# Altium PCB usb3_plug_to_picoblade.PcbDoc
Units mm, origin at the board's own origin, x right, y up, seen from the top; angles counter-clockwise.
Board outline 10 x 37 mm, 2 copper layers (Top Layer, Bottom Layer), stack 1.571 mm thick; 2 components, 8 nets, 25 pads, 6 vias.
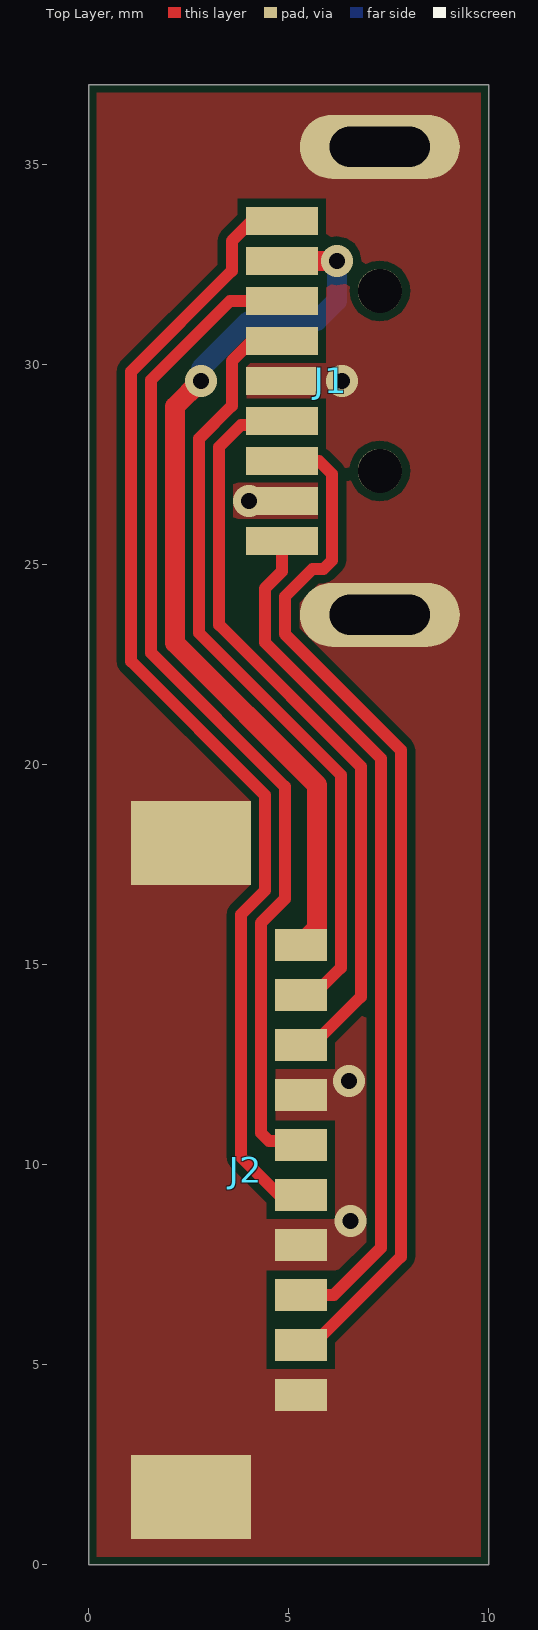
[diagram p0: Top Layer view]
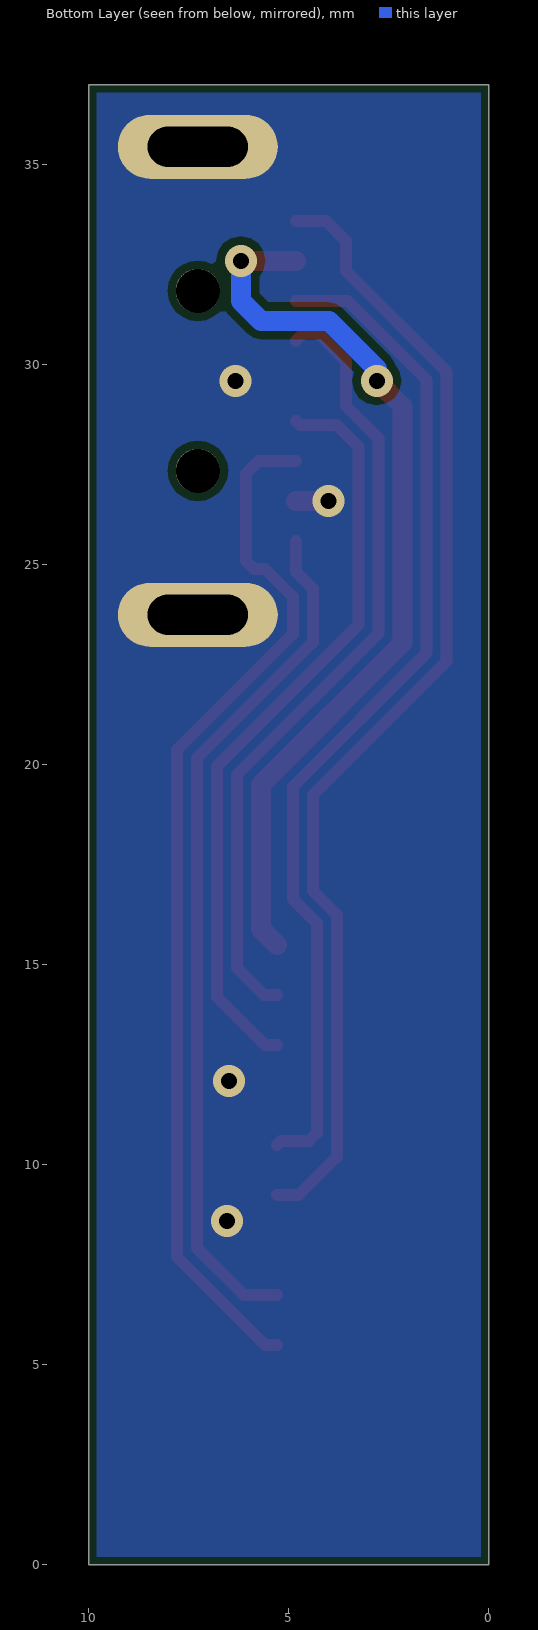
[diagram p1: Bottom Layer view, seen from below]

## Layer stack, top to bottom
Top Solder: solder mask 0.0102, Solder Resist, Dk 3.5
Top Layer: signal copper 0.0356
Dielectric 1: dielectric 1.5, FR-4, Dk 4.8
Bottom Layer: signal copper 0.0356
Bottom Solder: solder mask 0.0102, Solder Resist, Dk 3.5

## Board outline
0,0 10,0 10,37 0,37

## Design rules (kind name [scope] priority, off if disabled: settings)
BoardOutlineClearance [All] p1: gap=0.2 ignorepadtopadclearanceinfootprint=FALSE except(0: Arc-SplitContinuation Track-SplitContinuation SMDPad-SplitContinuation THPad-SplitContinuation Via-SplitContinuation Fill-SplitContinuation Poly-SplitContinuation Region-SplitContinuation Text-SplitContinuation)
Clearance [All] p1: gap=0.2 ignorepadtopadclearanceinfootprint=FALSE
ComponentClearance [All] p1: gap=0.2 collisioncheckmode=3 verticalgap=0.2 showdistances=FALSE
PlaneConnect [All] p1: planeconnectstyle=Direct reliefexpansion=0.508 reliefentries=4 reliefconductorwidth=0.254 reliefairgap=0.254
PolygonConnect [All] p1: connectstyle=Direct reliefconductorwidth=0.254 reliefentries=4 polygonreliefangle="90 Angle" airgapwidth=0.254
RoomDefinition usb3_plug_to_picoblade [InComponentClass('usb3_plug_to_picoblade')] p1: confinementstyle=ConfineIn formatcopy=TRUE lockcomponents=FALSE outline -18,-5 37.7,-5 37.7,45 -18,45
RoutingVias [All] p1: holewidth=0.3 width=0.6 viastyle="Through Hole" minholewidth=0.3 minwidth=0.6 maxholewidth=5 maxwidth=10
SolderMaskExpansion SolderMaskExpansionVia [IsVia] p1: expansion=-5
SolderMaskExpansion [All] p2: expansion=0.102
Width [All] p1: maxlimit=5 minlimit=0.2 preferedwidth=0.3
28 further rules are at their usual default settings.

## Classes and differential pairs
component class usb3_plug_to_picoblade: J1

## Components (designator, comment, footprint, x,y, rotation, side; value= is the part's Value field where it differs from the comment)
J1 "USB 3.0 Type A" 692112030100 14.7,29.6 r90 top
J2 "HEADER-10" PICOBLADE-10-SMD 5.3,10.5 r270 top

## Footprints (in the part's own frame and the unit in brackets; to place one, negate y for a bottom-side part, rotate by r counter-clockwise, add the part's x,y. Pads: shape width x height; smd on the part's side, far side on the other; paste and mask are expansions set on the pad)
692112030100 [mm] "USB 3.0 Type A SMT Plug with Clip"
  rect 0.7x1.8 smd: 1(3,9.875) 2(1,9.875) 3(-1,9.875) 4(-3,9.875) 5(-4,9.875) 6(-2,9.875) 7(0,9.875) 8(2,9.875) 9(4,9.875)
  round 1.1 hole 1.1 unplated: M1(-2.25,7.425) M2(2.25,7.425)
  oval 1.6x4 hole 1 slot 2.5 at 90 deg: S1(-5.85,7.425) S2(5.85,7.425)
  body extent -6,-10.37 6,10.38, height 1.85
PICOBLADE-10-SMD [mm]
  rect 0.8x1.3 smd: 1(-5,0) 2(-3.75,0) 3(-2.5,0) 4(-1.25,0) 5(0,0) 6(1.25,0) 7(2.5,0) 8(3.75,0) 9(5,0) 10(6.25,0)
  rect 2.1x3 smd: M1(-7.55,-2.75) M2(8.8,-2.75)
  body extent -8.2,-4 9.45,0.2, height 4.66

## Part data
J1: library part 692112030100, "USB 3.0 Type A Horizontal SMT Plug with Clip WR-COM", Operating Temperature="-20 to 85 degC", Rated Current="0.25 A", ComponentLink1Description=Manufacturer, ComponentLink1URL=http://www.we-online.de, ComponentLink2Description=Datasheet, ComponentLink2URL=http://katalog.we-online.de/em/datasheet/692112030100.pdf, Gender=Male, Interface Type="USB 3.0 Type A", Mounting Technology=SMT, Orientation=Horizontal, Packaging=Tray, Part Number=692112030100, Published Date="May 2018", Publisher="Wurth Elektronik"
J2: library part PICOBLADE-10-SMD

## Via types
v1: diameter 0.8, hole 0.4, Top Layer to Bottom Layer, 6 vias

## Nets (pads, with @x,y where several pads share a name; then routed paths per layer and width w, separated by ;. In a path a pad name is that pad's centre, name@x,y a point inside that pad or via, vN(x,y) a via of type N, cw(c..) or ccw(c..) an arc to the next point about the centre after c; other vN are vias at no path point)
D+: J1.3 J2.3 | length 19.1
  Top Layer w0.3: J1.3 4.725,28.5 3.807,28.5 3.257,27.95 3.257,23.499 6.8,19.956 6.8,14.2 5.6,13 J2.3
D-: J1.2 J2.2 | length 19.9
  Top Layer w0.3: J1.2 4.625,30.8 4.28,30.8 3.575,30.095 3.575,28.975 2.757,28.157 2.757,23.292 6.3,19.749 6.3,14.925 5.625,14.25 J2.2
GND: J1.4 J1.7 J1.S1 J1.S2 J2.4 J2.7 J2.10 J2.M1 J2.M2 | length 0.8
  Top Layer w0.5: v1(4.007,26.6) J1.4
  other v1: 6.544,8.6 6.5,12.1 6.327,29.6
RX+: J1.6 J2.9 | length 26.2
  Top Layer w0.3: J1.6 5.75,27.6 6.075,27.275 6.075,25.105 5.87,24.9 5.599,24.9 4.9,24.201 4.9,23.27 7.8,20.37 7.8,7.7 5.6,5.5 J2.9
RX-: J1.5 J2.8 | length 21.5
  Top Layer w0.3: J1.5 4.825,24.833 4.4,24.408 4.4,23.063 7.3,20.163 7.3,7.92 6.13,6.75 J2.8
TX+: J1.9 J2.6 | length 28.9
  Top Layer w0.3: J1.9 4.08,33.6 3.575,33.095 3.575,32.35 1.057,29.832 1.057,22.588 4.4,19.245 4.4,16.852 3.8,16.252 3.8,10.2 4.75,9.25 J2.6
TX-: J1.8 J2.5 | length 25.7
  Top Layer w0.3: J1.8 3.532,31.6 1.557,29.625 1.557,22.795 4.9,19.452 4.9,16.645 4.3,16.045 4.3,10.8 4.5,10.6 5.2,10.6 J2.5
VBUS: J1.1 J2.1 | length 22.8
  Top Layer w0.5: v1(2.8,29.6) 2.157,28.957 2.157,23.043 5.7,19.501 5.7,15.9 J2.1 ; J1.1 v1(6.2,32.6)
  Bottom Layer w0.5: v1(2.8,29.6) 2.8,29.9 4,31.1 5.7,31.1 6.2,31.6 v1(6.2,32.6)
pads on no net: J1.M1 J1.M2

## Polygon pours and split planes (outlines as drawn)
GND on Bottom Layer "GND_L02_P002" (solid, pour order 2): 0,0 10,0 10,37 0,37
GND on Top Layer "GND_L01_P000" (solid, pour order 0): 0,0 0,37 10,37 10,0

## Silkscreen, mask and mechanical layers (free items; w line width, h text height)
Mechanical 1:
  the board outline again, w0.2